# EAGLE board VQC10 (EAGLE 8.2.0)
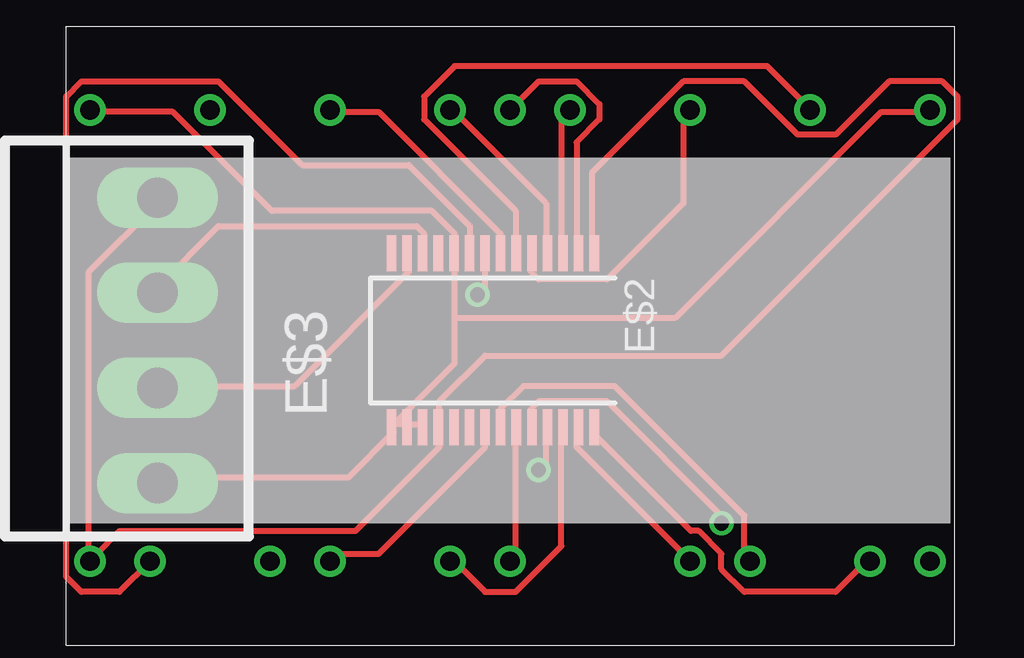
[diagram p0: board, top side]
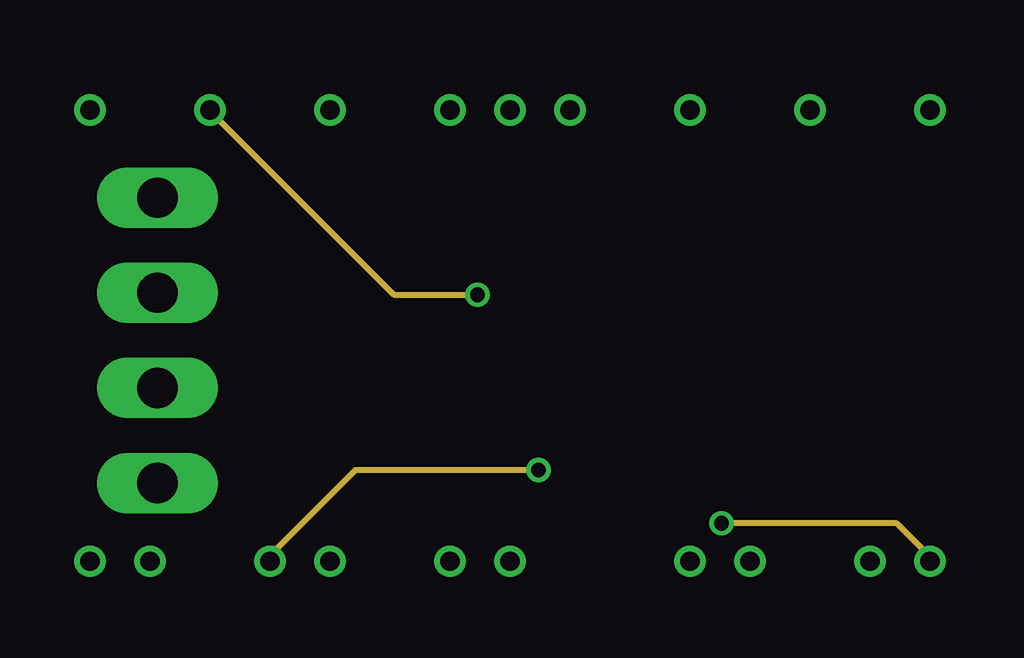
[diagram p1: board, inner layer Route2]

No outline drawn. Coordinates in mm, seen from the top.
Copper layers (1*2): Top 0.035mm / dielectric 1.5mm / Route2 0.035mm
Design rules "default *": minimum track width 10mil, minimum drill 24mil, track to track 8mil, track to pad 8mil, pad to pad 8mil, via to via 8mil, smd to smd 8mil, copper to edge 40mil, drill to drill 8mil, minimum pad ring 10mil, minimum via ring 8mil, stop-mask expansion 4mil, vias tented up to drill 0mil, thermal gap 10mil

## Footprints (pad centres in the part's own frame; a part is rotated, then mirrored left to right if it is on the bottom)
30DIP = drill 0.8: C1 36,3.5; C2 18.5,3.5; C3 28.5,3.5; C4 11,3.5; C5 1,3.5; D1 26,3.5; D2 16,3.5; D3 8.5,3.5; DO 33.5,3.5; GND1 1,22.3; GND2 36,22.3; R1 18.5,22.3; R2 21,22.3; R3 16,22.3; R4 26,22.3; R5 31,22.3; R6 11,22.3; R7 6,22.3; VCC 3.5,3.5
SSOP28 = smd 0.4 x 1.5: 1 -4.225,-3.625; 2 -3.575,-3.625; 3 -2.925,-3.625; 4 -2.275,-3.625; 5 -1.625,-3.625; 6 -0.975,-3.625; 7 -0.325,-3.625; 8 0.325,-3.625; 9 0.975,-3.625; 10 1.625,-3.625; 11 2.275,-3.625; 12 2.925,-3.625; 13 3.575,-3.625; 14 4.225,-3.625; 15 4.225,3.625; 16 3.575,3.625; 17 2.925,3.625; 18 2.275,3.625; 19 1.625,3.625; 20 0.975,3.625; 21 0.325,3.625; 22 -0.325,3.625; 23 -0.975,3.625; 24 -1.625,3.625; 25 -2.275,3.625; 26 -2.925,3.625; 27 -3.575,3.625; 28 -4.225,3.625
1X4MTA = drill 1.676 long: 1 5.944,0; 2 1.981,0; 3 -1.981,0; 4 -5.944,0

## Placement (x,y rotation side)
E$1  [30DIP]  12.7,11.43 0 top
E$2  [SSOP28]  30.48,24.13 180 top
E$3  [1X4MTA]  16.51,24.13 90 top

## Library data of the parts
E$1 = VQC10
E$2 = microchip
E$3 = con-amp

## Nets
S$1: E$1.DO E$2.28
S$2: E$1.D1 E$2.27
S$3: E$1.D2 E$2.26
S$4: E$1.D3 E$2.25
S$5: E$1.C1 E$2.24
S$6: E$1.C2 E$2.23
S$7: E$1.C3 E$2.22
S$8: E$1.C4 E$2.21
S$9: E$1.C5 E$2.1 E$2.18 E$3.1
S$10: E$1.R1 E$2.2
S$11: E$1.R2 E$2.3
S$12: E$1.R3 E$2.4
S$13: E$1.R4 E$2.5
S$14: E$1.R5 E$2.6
S$15: E$1.R6 E$2.7
S$16: E$1.R7 E$2.8
S$17: E$1.VCC E$2.9
S$18: E$1.GND1 E$1.GND2 E$2.10 E$2.15 E$2.16 E$2.17 E$3.4
S$21: E$2.12 E$3.2
S$22: E$2.13 E$3.3

## Tracks (layer width: path | path; a pad name or v marks a point on that pad's centre or on a via)
S$1
  Top 0.254: E$2.28 34.61,20.32 38.73,16.19 39.05,16.19 40.01,15.24 40.01,14.61 40.96,13.65 44.77,13.65 46.04,14.92 E$1.DO
S$2
  Top 0.254: E$2.27 33.97,20.32 33.97,19.68 38.42,15.24 E$1.D1
S$3
  Top 0.254: E$2.26 33.34,20.32 33.34,15.56 31.43,13.65 30.16,13.65 28.89,14.92 E$1.D2
S$4  (via drill 0.61 layers 1-2)
  Top 0.254: v32.38,18.73 32.7,19.05 32.7,20.32 E$2.25
  Route2 0.254: v32.38,18.73 24.77,18.73 21.27,15.24 E$1.D3
S$5  (via drill 0.61 layers 1-2)
  Top 0.254: v40.01,16.51 40.01,16.83 35.24,21.59 32.38,21.59 32.07,21.27 32.07,20.64 E$2.24
  Route2 0.254: v40.01,16.51 47.31,16.51 48.58,15.24 E$1.C1
S$6
  Top 0.254: E$2.23 31.43,20.32 31.43,15.24 E$1.C2
S$7
  Top 0.254: E$2.22 30.8,20.64 30.8,21.27 31.75,22.23 35.56,22.23 40.96,16.83 40.96,15.24 E$1.C3
S$8
  Top 0.254: E$2.21 30.16,20.32 30.16,19.68 25.72,15.24 23.81,15.24 E$1.C4
S$9
  Top 0.254: E$2.1 34.61,27.94 34.61,31.11 38.42,34.92 40.96,34.92 43.18,32.7 44.77,32.7 46.99,34.92 49.21,34.92 49.85,34.29 49.85,33.34 40.01,23.5 30.16,23.5 28.26,21.59 28.26,20.64 E$2.18 28.26,20.32 28.26,19.68 24.77,16.19 14.92,16.19 13.97,15.24 E$1.C5 13.65,15.24 13.65,26.99 16.51,29.84 E$3.1
S$10
  Top 0.254: E$2.2 33.97,27.94 33.97,32.38 34.92,33.34 34.92,33.97 33.97,34.92 32.38,34.92 31.43,33.97 E$1.R1
S$11
  Top 0.254: E$2.3 33.34,27.94 33.34,33.34 33.66,33.66 E$1.R2
S$12
  Top 0.254: E$2.4 32.7,27.94 32.7,29.84 28.89,33.66 E$1.R3
S$13
  Top 0.254: E$2.5 32.07,27.62 32.07,26.99 32.38,26.67 35.24,26.67 38.42,29.84 38.42,33.66 E$1.R4
S$14
  Top 0.254: E$2.6 31.43,27.94 31.43,29.53 27.62,33.34 27.62,34.29 28.89,35.56 41.91,35.56 43.5,33.97 E$1.R5
S$15
  Top 0.254: E$2.7 30.8,27.94 30.8,28.57 25.72,33.66 23.81,33.66 E$1.R6
S$16  (via drill 0.61 layers 1-2)
  Top 0.254: v29.84,26.04 30.16,26.35 30.16,27.62 E$2.8
  Route2 0.254: v29.84,26.04 26.35,26.04 18.73,33.66 E$1.R7
S$17
  Top 0.254: E$1.VCC 14.92,13.65 13.34,13.65 12.7,14.29 12.7,34.29 13.34,34.92 19.05,34.92 22.54,31.43 26.99,31.43 29.53,28.89 29.53,27.94 E$2.9
S$18
  Top 0.254: 26.99,20.64 26.35,20.64 | 26.99,20.64 27.62,20.64 E$2.17 | 26.99,20.64 E$2.16 | 28.89,25.08 28.89,23.18 26.35,20.64 | 28.89,25.08 28.89,27.62 E$2.10 28.89,27.94 28.89,28.57 27.94,29.53 21.27,29.53 17.14,33.66 13.97,33.66 E$1.GND1 | 26.35,20.64 E$2.15 26.35,20.32 24.45,18.41 16.51,18.41 E$3.4 | 28.89,25.08 38.1,25.08 46.67,33.66 48.58,33.66 E$1.GND2
S$21
  Top 0.254: E$2.12 27.62,27.94 27.62,28.57 27.3,28.89 19.05,28.89 16.51,26.35 E$3.2
S$22
  Top 0.254: E$2.13 26.99,27.62 26.99,26.99 22.23,22.23 16.51,22.23 E$3.3